# Altium PCB PCB1.PcbDoc (part 1 of 3)
Units mm, origin at the board's own origin, x right, y up, seen from the top; angles counter-clockwise.
Board outline 44.56 x 41.5 mm, 2 copper layers (Top Layer, Bottom Layer), stack 0.235 mm thick; 45 components, 47 nets, 215 pads, 58 vias.
Unrouted connection lines stored in the file: 2.
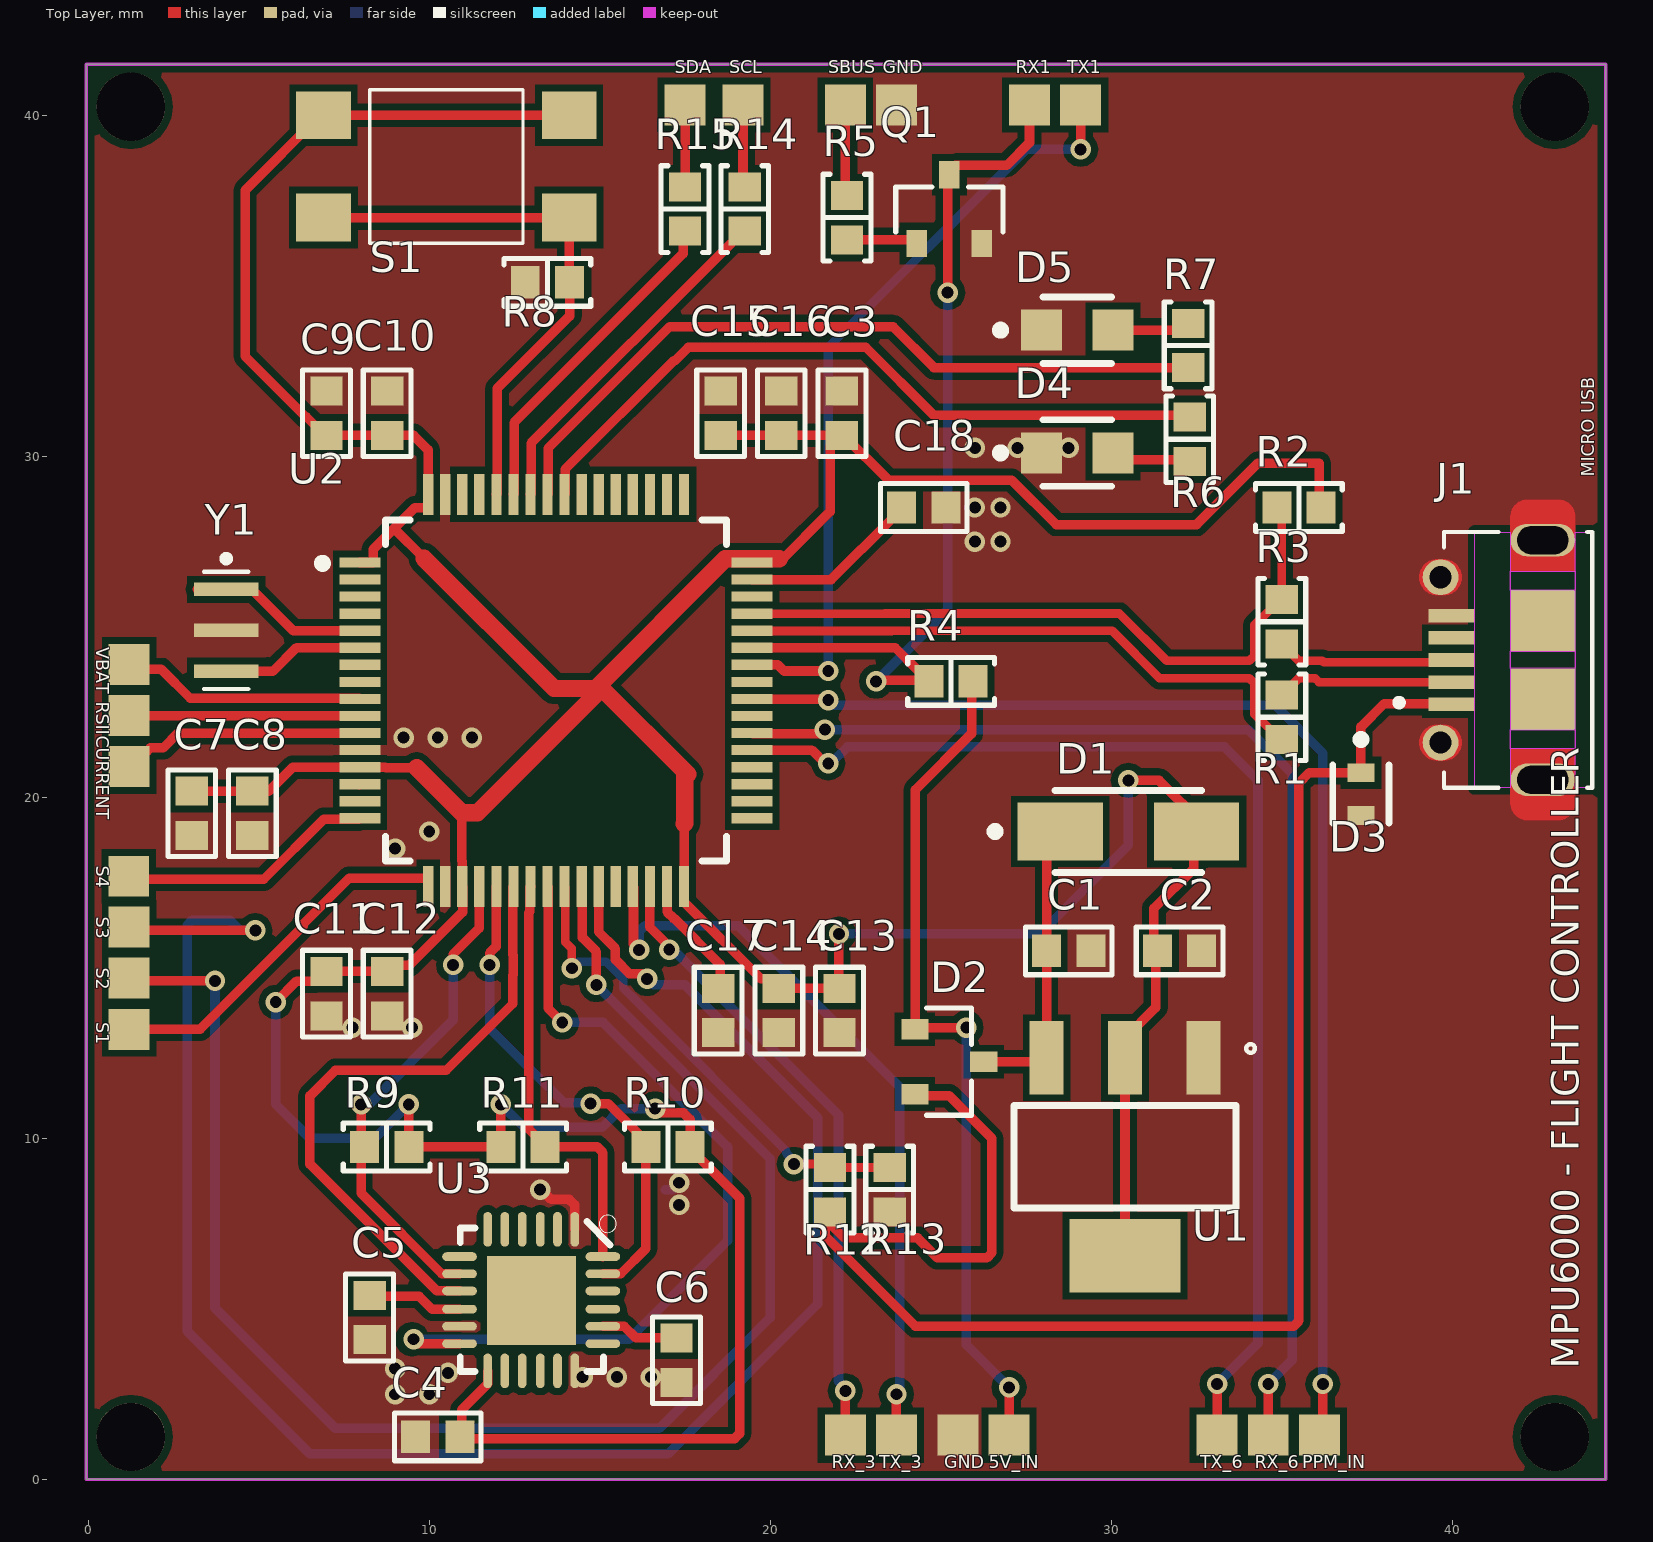
[diagram p0: Top Layer view]
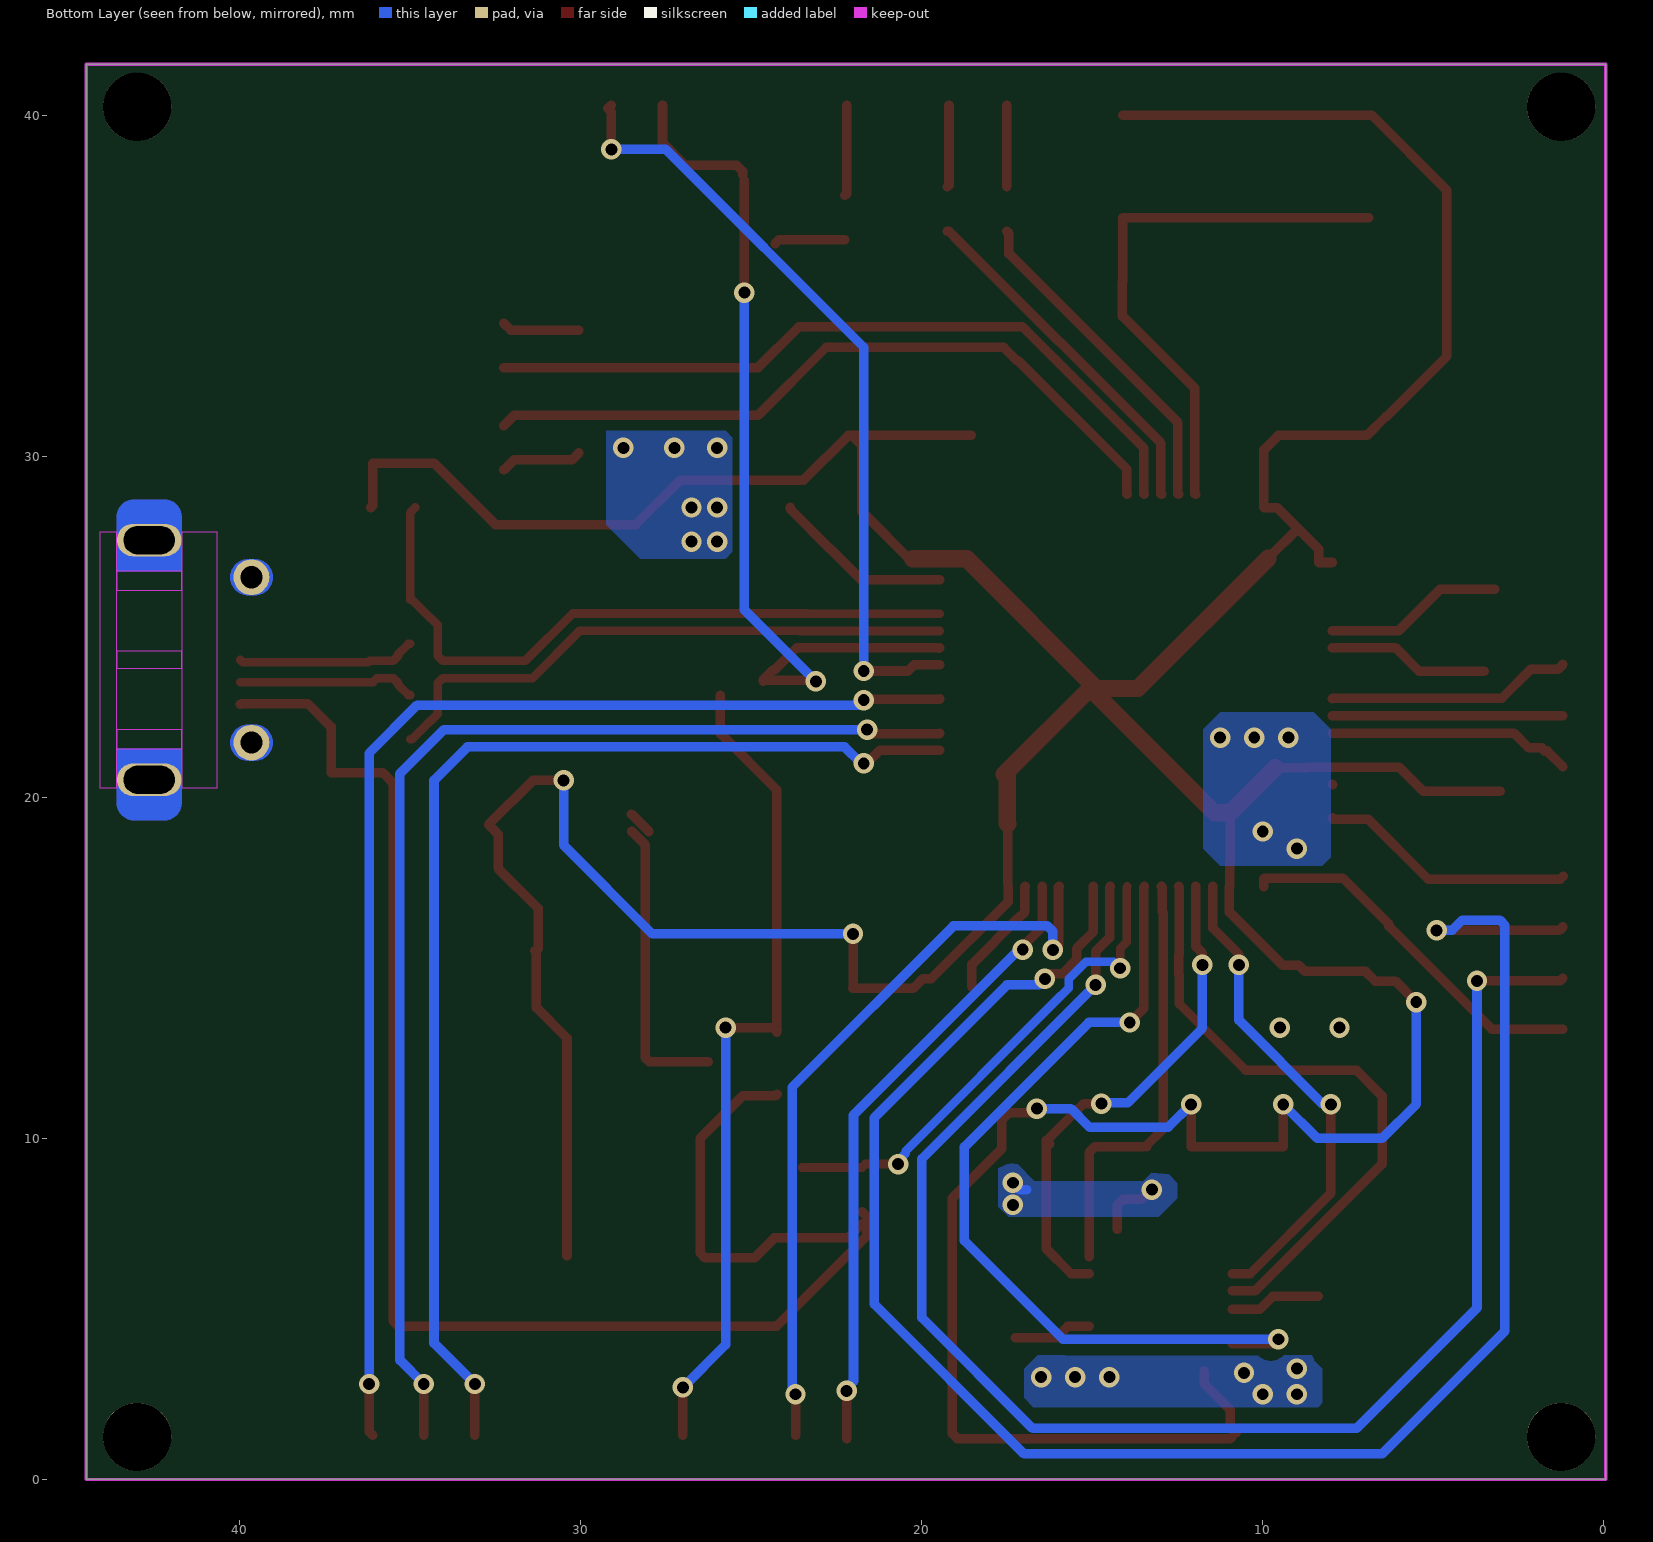
[diagram p1: Bottom Layer view, seen from below]
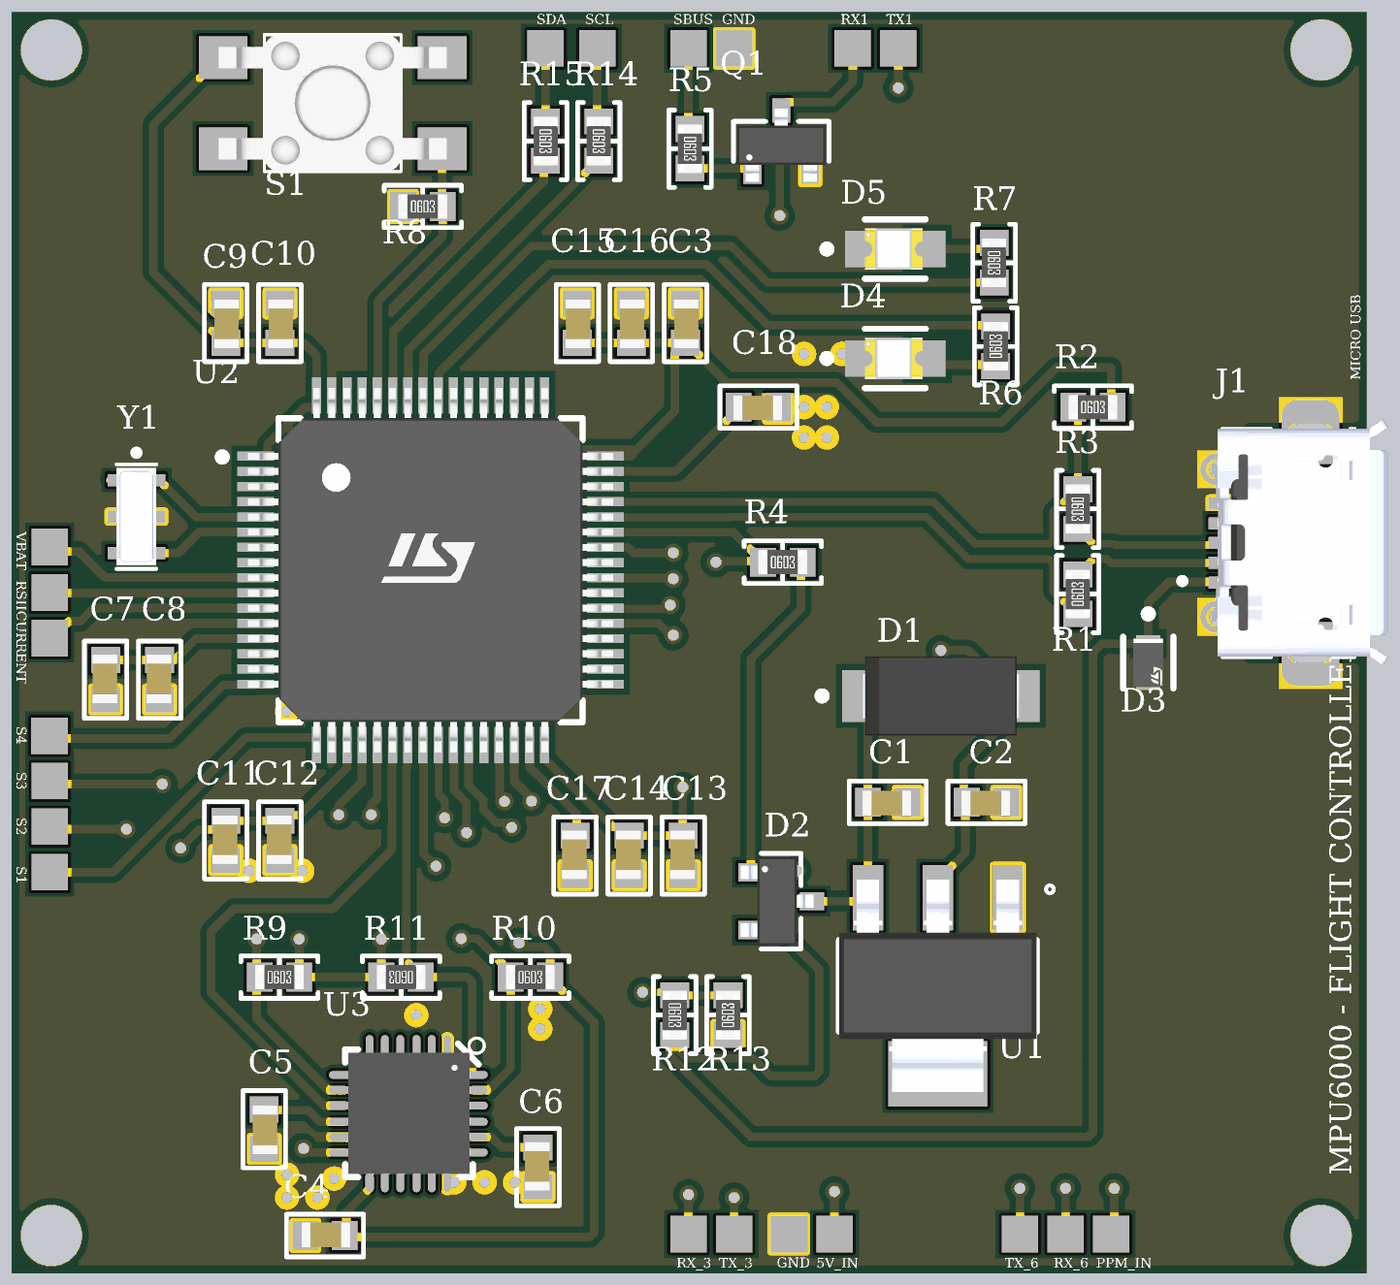
[diagram p3: 3D render of the assembled board from above, using the file's embedded part models]

## Layer stack, top to bottom
Top Solder: solder mask 0.0254, SM-001, Dk 4
Top Layer: signal copper 0.035
Dielectric 1: core 0.1651, Core-043, Dk 4.3
Bottom Layer: signal copper 0.035
Bottom Solder: solder mask 0.0254, SM-001, Dk 4

## Board outline
-0.06,0 -0.06,41.5 44.5,41.5 44.5,0

## Design rules (kind name [scope] priority, off if disabled: settings)
Clearance [All] p1: gap=0.203 ignorepadtopadclearanceinfootprint=FALSE except(0.178: Arc-Arc Arc-Track Arc-SMDPad Arc-THPad Arc-Hole Track-Track Track-SMDPad Track-THPad Track-Hole SMDPad-SMDPad SMDPad-THPad SMDPad-Hole THPad-THPad THPad-Hole Via-Hole Fill-Hole Poly-Hole Region-Hole Text-Hole; 0.254: Arc-Via Track-Via SMDPad-Via THPad-Via Via-Via)
DiffPairsRouting USB_90 [InDifferentialPair('USB')] p1: maxlimit=0.254 minlimit=0.127 mostfreqgap=0.254 toplayer_minwidth=0.254 toplayer_maxwidth=0.981 toplayer_prefwidth=0.254 bottomlayer_minwidth=0.254 bottomlayer_maxwidth=0.981 bottomlayer_prefwidth=0.254 impedanceprofiledriven=TRUE impedanceprofileid={76CF626A-820F-438A-9B0B-6253913FB44B} impedanceprofilevalue=90.000000 maxuncoupledlength=12.7
DiffPairsRouting USB_MCU_90 [InDifferentialPair('USB_MCU')] p2: maxlimit=0.254 minlimit=0.127 mostfreqgap=0.254 toplayer_minwidth=0.254 toplayer_maxwidth=0.981 toplayer_prefwidth=0.254 bottomlayer_minwidth=0.254 bottomlayer_maxwidth=0.981 bottomlayer_prefwidth=0.254 impedanceprofiledriven=TRUE impedanceprofileid={76CF626A-820F-438A-9B0B-6253913FB44B} impedanceprofilevalue=90.000000 maxuncoupledlength=12.7
MinimumSolderMaskSliver [All] p1: minsoldermaskwidth=0.127
PolygonConnect [All] p1: connectstyle=Direct reliefconductorwidth=0.254 reliefentries=4 polygonreliefangle="90 Angle" airgapwidth=0.254
RoutingVias [All] p1: holewidth=0.3 width=0.5 viastyle="Through Hole" minholewidth=0.25 minwidth=0.4 maxholewidth=0.5 maxwidth=1
SilkToSilkClearance [All] p1: silktosilkclearance=0.127
SilkToSolderMaskClearance [IsPad] p1: minsilkscreentomaskgap=0.127 clearancetoexposedcopper=TRUE
SolderMaskExpansion [All] p1: expansion=0.102 istentingtop=FALSE
UnRoutedNet [All] p1: checkbadconnections=TRUE
Width [All] p1: maxlimit=1.778 minlimit=0.203 preferedwidth=0.279
25 further rules are at their usual default settings.

## Classes and differential pairs
component class Sheet2: C17 C18 R8 R9 R10 R11 R12 R13 R14 R15 S1 U2 Y1
component class Sheet1: C1 C2 C3 C4 C5 C6 C7 C8 C9 C10 C11 C12 C13 C14 C15 C16 D1 D2 D3 D4 D5 J1 Q1 R1 R2 R3 R4 R5 R6 R7 U1 U3
differential pair USB: +USB_P -USB_N
differential pair USB_MCU: +D+ -D-

## Components (designator, comment, footprint, x,y, rotation, side; value= is the part's Value field where it differs from the comment)
C1 "10uF" CAP-0603 28.75,15.5 r180 top
C2 "10uF" CAP-0603 32,15.5 r180 top
C3 "100nF" CAP-0603 22.101,31.265 r270 top
C4 "100nF" CAP-0603 10.25,1.25 r0 top
C5 "100nF" CAP-0603 8.25,4.75 r270 top
C6 "2.2nF" CAP-0603 17.25,3.5 r90 top
C7 "1uF" CAP-0603 3.035,19.535 r90 top
C8 "100nF" CAP-0603 4.813,19.535 r90 top
C9 "10uF" CAP-0603 6.988,31.265 r270 top
C10 "100nF" CAP-0603 8.766,31.265 r270 top
C11 "10uF" CAP-0603 6.988,14.247 r90 top
C12 "100nF" CAP-0603 8.766,14.247 r90 top
C13 "10uF" CAP-0603 22.028,13.75 r90 top
C14 "100nF" CAP-0603 20.25,13.75 r90 top
C15 "10uF" CAP-0603 18.545,31.265 r270 top
C16 "100nF" CAP-0603 20.323,31.265 r270 top
C17 "100nF" CAP-0603 18.472,13.75 r90 top
C18 "100nF" CAP-0603 24.5,28.5 r180 top
D1 "S1A-13-F_1" S1A-13-F 30.5,19 r0 top
D2 "BAT54C" SOT23-3 25.25,12.25 r270 top
D3 "ESDA7P60-1U1M" TVS-1610 37.318,20.097 r270 top
D4 "LS R976-NR-1" "LS R976-NR-1" 29,30.1 r0 top
D5 "LS R976-NR-1" "LS R976-NR-1" 29,33.7 r0 top
J1 "ZX62D-B-5P8" HRS_ZX62D-B-5P8 42.577,24.03 r90 top
Q1 "BC857BLT3G" SOT23-3 25.25,37.25 r0 top
R1 "22Ohms" RES-0603 35,22.35 r90 top
R2 "1.5KOhms" RES-0603 35.5,28.5 r0 top
R3 "22Ohms" RES-0603 35,25.15 r270 top
R4 "10K" RES-0603 25.3,23.4 r0 top
R5 "4.7kOhms" RES-0603 22.25,37 r270 top
R6 "47Ohms" RES-0603 32.3,30.5 r90 top
R7 "47Ohms" RES-0603 32.25,33.25 r270 top
R8 "10K" RES-0603 13.465,35.099 r0 top
R9 "10K" RES-0603 8.75,9.75 r0 top
R10 "10K" RES-0603 17,9.75 r0 top
R11 "10K" RES-0603 12.75,9.75 r180 top
R12 "10K" RES-0603 21.75,8.5 r270 top
R13 "10K" RES-0603 23.5,8.5 r90 top
R14 "10K" RES-0603 19.25,37.25 r270 top
R15 "10K" RES-0603 17.5,37.25 r270 top
S1 "TL3305BF260QG" TL3305BF260QG 10.5,38.5 r0 top
U1 "NCP1117ST33T3G" SOT-223-4 30.4,9.464 r270 top
U2 "STM32F405RGT6" STMicroelectronics_LQFP64-5W_MFG 13.719,23.137 r0 top
U3 "MPU-6000" QFN-24-EP 13.01,5.27 r270 top
Y1 "CSTCE8M00G52-R0" OSC_CSTCE8M00G52-R0 4.048,24.9 r270 top

## Footprints (in the part's own frame and the unit in brackets; to place one, negate y for a bottom-side part, rotate by r counter-clockwise, add the part's x,y. Pads: shape width x height; smd on the part's side, far side on the other; paste and mask are expansions set on the pad)
CAP-0603 [mm]
  rect 0.85x0.95 smd: 1(-0.65,0) 2(0.65,0)
  silkscreen extent -1.27,-0.7 1.27,0.7, body extent -0.78,-0.39 0.82,0.44, height 0.82
HRS_ZX62D-B-5P8 [mm]
  rect 0.4x1.35 smd: 1(-1.3,2.6) 2(-0.65,2.6) 3(0,2.6) 4(0.65,2.6) 5(1.3,2.6)
  round 1.05 hole 0.65: S1(-2.425,2.925) S2(2.425,2.925)
  oval 0.95x1.9 hole 0.825 slot 1.5 at 90 deg: S3(-3.512,-0.075) S6(3.512,-0.075)
  rect 1.8x1.9 smd: S4(-1.15,-0.075) S5(1.15,-0.075)
  Top Layer region: 4.226,0.874 4.252,0.872 4.278,0.869 4.304,0.864 4.329,0.858 4.355,0.851 4.379,0.842 4.403,0.832 4.427,0.821 4.45,0.808 4.472,0.794 4.494,0.78 4.515,0.764 4.535,0.747 4.554,0.729 4.572,0.71 4.589,0.69 4.605,0.669 4.619,0.647 4.633,0.625 4.646,0.602 4.657,0.578 4.667,0.554 4.676,0.53 4.683,0.504 4.689,0.479 4.694,0.453 4.697,0.427 4.699,0.401 4.7,0.375 4.7,-0.075 3.925,-0.075 3.925,0.4 3.925,0.414 3.923,0.429 3.922,0.443 3.919,0.457 3.916,0.471 3.912,0.485 3.907,0.499 3.901,0.512 3.895,0.525 3.888,0.537 3.881,0.55 3.872,0.562 3.864,0.573 3.854,0.584 3.844,0.594 3.834,0.604 3.823,0.614 3.812,0.622 3.8,0.631 3.788,0.638 3.775,0.645 3.762,0.651 3.749,0.657 3.735,0.662 3.721,0.666 3.707,0.669 3.693,0.672 3.679,0.673 3.664,0.675 3.65,0.675 3.4,0.675 3.384,0.675 3.369,0.673 3.353,0.671 3.338,0.668 3.322,0.665 3.307,0.66 3.292,0.655 3.278,0.649 3.264,0.642 3.25,0.635 3.237,0.627 3.224,0.618 3.211,0.608 3.199,0.598 3.188,0.587 3.177,0.576 3.167,0.564 3.157,0.551 3.148,0.538 3.14,0.525 3.133,0.511 3.126,0.497 3.12,0.483 3.115,0.468 3.11,0.453 3.107,0.437 3.104,0.422 3.102,0.406 3.1,0.391 3.1,0.375 3.1,-0.075 2.6,-0.075 2.6,0.875 4.2,0.875
  Top Layer region: -2.6,-1.025 -4.2,-1.025 -4.226,-1.024 -4.252,-1.022 -4.278,-1.019 -4.304,-1.014 -4.329,-1.008 -4.355,-1.001 -4.379,-0.992 -4.403,-0.982 -4.427,-0.971 -4.45,-0.958 -4.472,-0.944 -4.494,-0.93 -4.515,-0.914 -4.535,-0.897 -4.554,-0.879 -4.572,-0.86 -4.589,-0.84 -4.605,-0.819 -4.619,-0.797 -4.633,-0.775 -4.646,-0.752 -4.657,-0.728 -4.667,-0.704 -4.676,-0.68 -4.683,-0.654 -4.689,-0.629 -4.694,-0.603 -4.697,-0.577 -4.699,-0.551 -4.7,-0.525 -4.7,-0.075 -3.925,-0.075 -3.925,-0.55 -3.925,-0.564 -3.923,-0.579 -3.922,-0.593 -3.919,-0.607 -3.916,-0.621 -3.912,-0.635 -3.907,-0.649 -3.901,-0.662 -3.895,-0.675 -3.888,-0.687 -3.881,-0.7 -3.872,-0.712 -3.864,-0.723 -3.854,-0.734 -3.844,-0.744 -3.834,-0.754 -3.823,-0.764 -3.812,-0.772 -3.8,-0.781 -3.788,-0.788 -3.775,-0.795 -3.762,-0.801 -3.749,-0.807 -3.735,-0.812 -3.721,-0.816 -3.707,-0.819 -3.693,-0.822 -3.679,-0.823 -3.664,-0.825 -3.65,-0.825 -3.4,-0.825 -3.384,-0.825 -3.369,-0.823 -3.353,-0.821 -3.338,-0.818 -3.322,-0.815 -3.307,-0.81 -3.292,-0.805 -3.278,-0.799 -3.264,-0.792 -3.25,-0.785 -3.237,-0.777 -3.224,-0.768 -3.211,-0.758 -3.199,-0.748 -3.188,-0.737 -3.177,-0.726 -3.167,-0.714 -3.157,-0.701 -3.148,-0.688 -3.14,-0.675 -3.133,-0.661 -3.126,-0.647 -3.12,-0.633 -3.115,-0.618 -3.11,-0.603 -3.107,-0.587 -3.104,-0.572 -3.102,-0.556 -3.1,-0.541 -3.1,-0.525 -3.1,-0.075 -2.6,-0.075
  Top Layer region: 4.7,-0.525 4.699,-0.551 4.697,-0.577 4.694,-0.603 4.689,-0.629 4.683,-0.654 4.676,-0.68 4.667,-0.704 4.657,-0.728 4.646,-0.752 4.633,-0.775 4.619,-0.797 4.605,-0.819 4.589,-0.84 4.572,-0.86 4.554,-0.879 4.535,-0.897 4.515,-0.914 4.494,-0.93 4.472,-0.944 4.45,-0.958 4.427,-0.971 4.403,-0.982 4.379,-0.992 4.355,-1.001 4.329,-1.008 4.304,-1.014 4.278,-1.019 4.252,-1.022 4.226,-1.024 4.2,-1.025 2.6,-1.025 2.6,-0.075 3.1,-0.075 3.1,-0.525 3.1,-0.541 3.102,-0.556 3.104,-0.572 3.107,-0.587 3.11,-0.603 3.115,-0.618 3.12,-0.633 3.126,-0.647 3.133,-0.661 3.14,-0.675 3.148,-0.688 3.157,-0.701 3.167,-0.714 3.177,-0.726 3.188,-0.737 3.199,-0.748 3.211,-0.758 3.224,-0.768 3.237,-0.777 3.25,-0.785 3.264,-0.792 3.278,-0.799 3.292,-0.805 3.307,-0.81 3.322,-0.815 3.338,-0.818 3.353,-0.821 3.369,-0.823 3.384,-0.825 3.4,-0.825 3.625,-0.825 3.641,-0.825 3.656,-0.823 3.672,-0.821 3.687,-0.818 3.703,-0.815 3.718,-0.81 3.733,-0.805 3.747,-0.799 3.761,-0.792 3.775,-0.785 3.788,-0.777 3.801,-0.768 3.814,-0.758 3.826,-0.748 3.837,-0.737 3.848,-0.726 3.858,-0.714 3.868,-0.701 3.877,-0.688 3.885,-0.675 3.892,-0.661 3.899,-0.647 3.905,-0.633 3.91,-0.618 3.915,-0.603 3.918,-0.587 3.921,-0.572 3.923,-0.556 3.925,-0.541 3.925,-0.525 3.925,-0.075 4.7,-0.075
  Top Layer region: -2.6,-0.075 -3.1,-0.075 -3.1,0.375 -3.1,0.391 -3.102,0.406 -3.104,0.422 -3.107,0.437 -3.11,0.453 -3.115,0.468 -3.12,0.483 -3.126,0.497 -3.133,0.511 -3.14,0.525 -3.148,0.538 -3.157,0.551 -3.167,0.564 -3.177,0.576 -3.188,0.587 -3.199,0.598 -3.211,0.608 -3.224,0.618 -3.237,0.627 -3.25,0.635 -3.264,0.642 -3.278,0.649 -3.292,0.655 -3.307,0.66 -3.322,0.665 -3.338,0.668 -3.353,0.671 -3.369,0.673 -3.384,0.675 -3.4,0.675 -3.625,0.675 -3.641,0.675 -3.656,0.673 -3.672,0.671 -3.687,0.668 -3.703,0.665 -3.718,0.66 -3.733,0.655 -3.747,0.649 -3.761,0.642 -3.775,0.635 -3.788,0.627 -3.801,0.618 -3.814,0.608 -3.826,0.598 -3.837,0.587 -3.848,0.576 -3.858,0.564 -3.868,0.551 -3.877,0.538 -3.885,0.525 -3.892,0.511 -3.899,0.497 -3.905,0.483 -3.91,0.468 -3.915,0.453 -3.918,0.437 -3.921,0.422 -3.923,0.406 -3.925,0.391 -3.925,0.375 -3.925,-0.075 -4.7,-0.075 -4.7,0.375 -4.699,0.401 -4.697,0.427 -4.694,0.453 -4.689,0.479 -4.683,0.504 -4.676,0.53 -4.667,0.554 -4.657,0.578 -4.646,0.602 -4.633,0.625 -4.619,0.647 -4.605,0.669 -4.589,0.69 -4.572,0.71 -4.554,0.729 -4.535,0.747 -4.515,0.764 -4.494,0.78 -4.472,0.794 -4.45,0.808 -4.427,0.821 -4.403,0.832 -4.379,0.842 -4.355,0.851 -4.329,0.858 -4.304,0.864 -4.278,0.869 -4.252,0.872 -4.226,0.874 -4.2,0.875 -2.6,0.875
  Top Layer region: 2.425,3.35 2.408,3.35 2.391,3.348 2.374,3.346 2.357,3.343 2.341,3.339 2.325,3.334 2.309,3.328 2.293,3.322 2.277,3.315 2.262,3.306 2.248,3.298 2.234,3.288 2.22,3.278 2.208,3.267 2.195,3.255 2.183,3.242 2.172,3.23 2.162,3.216 2.152,3.202 2.144,3.187 2.135,3.173 2.128,3.157 2.122,3.141 2.116,3.125 2.111,3.109 2.107,3.093 2.104,3.076 2.102,3.059 2.1,3.042 2.1,3.025 2.1,2.825 2.1,2.808 2.102,2.791 2.104,2.774 2.107,2.757 2.111,2.741 2.116,2.725 2.122,2.709 2.128,2.693 2.135,2.677 2.144,2.662 2.152,2.648 2.162,2.634 2.172,2.62 2.183,2.608 2.195,2.595 2.208,2.583 2.22,2.572 2.234,2.562 2.248,2.552 2.262,2.544 2.277,2.535 2.293,2.528 2.309,2.522 2.325,2.516 2.341,2.511 2.357,2.507 2.374,2.504 2.391,2.502 2.408,2.5 2.425,2.5 2.425,2.3 2.398,2.301 2.37,2.303 2.343,2.306 2.316,2.311 2.289,2.318 2.263,2.326 2.237,2.335 2.211,2.345 2.187,2.357 2.163,2.37 2.139,2.385 2.116,2.4 2.095,2.417 2.074,2.435 2.054,2.454 2.035,2.474 2.017,2.495 2,2.516 1.985,2.539 1.97,2.562 1.957,2.587 1.945,2.611 1.935,2.637 1.926,2.663 1.918,2.689 1.911,2.716 1.906,2.743 1.903,2.77 1.901,2.798 1.9,2.825 1.9,3.025 1.901,3.052 1.903,3.08 1.906,3.107 1.911,3.134 1.918,3.161 1.926,3.187 1.935,3.213 1.945,3.239 1.957,3.263 1.97,3.287 1.985,3.311 2,3.334 2.017,3.355 2.035,3.376 2.054,3.396 2.074,3.415 2.095,3.433 2.116,3.45 2.139,3.465 2.163,3.48 2.187,3.493 2.211,3.505 2.237,3.515 2.263,3.524 2.289,3.532 2.316,3.539 2.343,3.544 2.37,3.547 2.398,3.549 2.425,3.55
  Top Layer region: 2.452,3.549 2.48,3.547 2.507,3.544 2.534,3.539 2.561,3.532 2.587,3.524 2.613,3.515 2.639,3.505 2.663,3.493 2.688,3.48 2.711,3.465 2.734,3.45 2.755,3.433 2.776,3.415 2.796,3.396 2.815,3.376 2.833,3.355 2.85,3.334 2.865,3.311 2.88,3.287 2.893,3.263 2.905,3.239 2.915,3.213 2.924,3.187 2.932,3.161 2.939,3.134 2.944,3.107 2.947,3.08 2.949,3.052 2.95,3.025 2.95,2.825 2.949,2.798 2.947,2.77 2.944,2.743 2.939,2.716 2.932,2.689 2.924,2.663 2.915,2.637 2.905,2.611 2.893,2.587 2.88,2.562 2.865,2.539 2.85,2.516 2.833,2.495 2.815,2.474 2.796,2.454 2.776,2.435 2.755,2.417 2.734,2.4 2.711,2.385 2.688,2.37 2.663,2.357 2.639,2.345 2.613,2.335 2.587,2.326 2.561,2.318 2.534,2.311 2.507,2.306 2.48,2.303 2.452,2.301 2.425,2.3 2.425,2.5 2.442,2.5 2.459,2.502 2.476,2.504 2.493,2.507 2.509,2.511 2.525,2.516 2.541,2.522 2.557,2.528 2.573,2.535 2.588,2.544 2.602,2.552 2.616,2.562 2.63,2.572 2.642,2.583 2.655,2.595 2.667,2.608 2.678,2.62 2.688,2.634 2.698,2.648 2.706,2.662 2.715,2.677 2.722,2.693 2.728,2.709 2.734,2.725 2.739,2.741 2.743,2.757 2.746,2.774 2.748,2.791 2.75,2.808 2.75,2.825 2.75,3.025 2.75,3.042 2.748,3.059 2.746,3.076 2.743,3.093 2.739,3.109 2.734,3.125 2.728,3.141 2.722,3.157 2.715,3.173 2.706,3.187 2.698,3.202 2.688,3.216 2.678,3.23 2.667,3.242 2.655,3.255 2.642,3.267 2.63,3.278 2.616,3.288 2.602,3.298 2.588,3.306 2.573,3.315 2.557,3.322 2.541,3.328 2.525,3.334 2.509,3.339 2.493,3.343 2.476,3.346 2.459,3.348 2.442,3.35 2.425,3.35 2.425,3.55
  Top Layer region: -2.425,3.35 -2.442,3.35 -2.459,3.348 -2.476,3.346 -2.493,3.343 -2.509,3.339 -2.525,3.334 -2.541,3.328 -2.557,3.322 -2.573,3.315 -2.588,3.306 -2.602,3.298 -2.616,3.288 -2.63,3.278 -2.642,3.267 -2.655,3.255 -2.667,3.242 -2.678,3.23 -2.688,3.216 -2.698,3.202 -2.706,3.187 -2.715,3.173 -2.722,3.157 -2.728,3.141 -2.734,3.125 -2.739,3.109 -2.743,3.093 -2.746,3.076 -2.748,3.059 -2.75,3.042 -2.75,3.025 -2.75,2.825 -2.75,2.808 -2.748,2.791 -2.746,2.774 -2.743,2.757 -2.739,2.741 -2.734,2.725 -2.728,2.709 -2.722,2.693 -2.715,2.677 -2.706,2.662 -2.698,2.648 -2.688,2.634 -2.678,2.62 -2.667,2.608 -2.655,2.595 -2.642,2.583 -2.63,2.572 -2.616,2.562 -2.602,2.552 -2.588,2.544 -2.573,2.535 -2.557,2.528 -2.541,2.522 -2.525,2.516 -2.509,2.511 -2.493,2.507 -2.476,2.504 -2.459,2.502 -2.442,2.5 -2.425,2.5 -2.425,2.3 -2.452,2.301 -2.48,2.303 -2.507,2.306 -2.534,2.311 -2.561,2.318 -2.587,2.326 -2.613,2.335 -2.639,2.345 -2.663,2.357 -2.688,2.37 -2.711,2.385 -2.734,2.4 -2.755,2.417 -2.776,2.435 -2.796,2.454 -2.815,2.474 -2.833,2.495 -2.85,2.516 -2.865,2.539 -2.88,2.562 -2.893,2.587 -2.905,2.611 -2.915,2.637 -2.924,2.663 -2.932,2.689 -2.939,2.716 -2.944,2.743 -2.947,2.77 -2.949,2.798 -2.95,2.825 -2.95,3.025 -2.949,3.052 -2.947,3.08 -2.944,3.107 -2.939,3.134 -2.932,3.161 -2.924,3.187 -2.915,3.213 -2.905,3.239 -2.893,3.263 -2.88,3.287 -2.865,3.311 -2.85,3.334 -2.833,3.355 -2.815,3.376 -2.796,3.396 -2.776,3.415 -2.755,3.433 -2.734,3.45 -2.711,3.465 -2.688,3.48 -2.663,3.493 -2.639,3.505 -2.613,3.515 -2.587,3.524 -2.561,3.532 -2.534,3.539 -2.507,3.544 -2.48,3.547 -2.452,3.549 -2.425,3.55
  Top Layer region: -2.398,3.549 -2.37,3.547 -2.343,3.544 -2.316,3.539 -2.289,3.532 -2.263,3.524 -2.237,3.515 -2.211,3.505 -2.187,3.493 -2.163,3.48 -2.139,3.465 -2.116,3.45 -2.095,3.433 -2.074,3.415 -2.054,3.396 -2.035,3.376 -2.017,3.355 -2,3.334 -1.985,3.311 -1.97,3.287 -1.957,3.263 -1.945,3.239 -1.935,3.213 -1.926,3.187 -1.918,3.161 -1.911,3.134 -1.906,3.107 -1.903,3.08 -1.901,3.052 -1.9,3.025 -1.9,2.825 -1.901,2.798 -1.903,2.77 -1.906,2.743 -1.911,2.716 -1.918,2.689 -1.926,2.663 -1.935,2.637 -1.945,2.611 -1.957,2.587 -1.97,2.562 -1.985,2.539 -2,2.516 -2.017,2.495 -2.035,2.474 -2.054,2.454 -2.074,2.435 -2.095,2.417 -2.116,2.4 -2.139,2.385 -2.163,2.37 -2.187,2.357 -2.211,2.345 -2.237,2.335 -2.263,2.326 -2.289,2.318 -2.316,2.311 -2.343,2.306 -2.37,2.303 -2.398,2.301 -2.425,2.3 -2.425,2.5 -2.408,2.5 -2.391,2.502 -2.374,2.504 -2.357,2.507 -2.341,2.511 -2.325,2.516 -2.309,2.522 -2.293,2.528 -2.277,2.535 -2.262,2.544 -2.248,2.552 -2.234,2.562 -2.22,2.572 -2.208,2.583 -2.195,2.595 -2.183,2.608 -2.172,2.62 -2.162,2.634 -2.152,2.648 -2.144,2.662 -2.135,2.677 -2.128,2.693 -2.122,2.709 -2.116,2.725 -2.111,2.741 -2.107,2.757 -2.104,2.774 -2.102,2.791 -2.1,2.808 -2.1,2.825 -2.1,3.025 -2.1,3.042 -2.102,3.059 -2.104,3.076 -2.107,3.093 -2.111,3.109 -2.116,3.125 -2.122,3.141 -2.128,3.157 -2.135,3.173 -2.144,3.187 -2.152,3.202 -2.162,3.216 -2.172,3.23 -2.183,3.242 -2.195,3.255 -2.208,3.267 -2.22,3.278 -2.234,3.288 -2.248,3.298 -2.262,3.306 -2.277,3.315 -2.293,3.322 -2.309,3.328 -2.325,3.334 -2.341,3.339 -2.357,3.343 -2.374,3.346 -2.391,3.348 -2.408,3.35 -2.425,3.35 -2.425,3.55
  Bottom Layer region: 4.226,0.874 4.252,0.872 4.278,0.869 4.304,0.864 4.329,0.858 4.355,0.851 4.379,0.842 4.403,0.832 4.427,0.821 4.45,0.808 4.472,0.794 4.494,0.78 4.515,0.764 4.535,0.747 4.554,0.729 4.572,0.71 4.589,0.69 4.605,0.669 4.619,0.647 4.633,0.625 4.646,0.602 4.657,0.578 4.667,0.554 4.676,0.53 4.683,0.504 4.689,0.479 4.694,0.453 4.697,0.427 4.699,0.401 4.7,0.375 4.7,-0.075 3.925,-0.075 3.925,0.4 3.925,0.414 3.923,0.429 3.922,0.443 3.919,0.457 3.916,0.471 3.912,0.485 3.907,0.499 3.901,0.512 3.895,0.525 3.888,0.537 3.881,0.55 3.872,0.562 3.864,0.573 3.854,0.584 3.844,0.594 3.834,0.604 3.823,0.614 3.812,0.622 3.8,0.631 3.788,0.638 3.775,0.645 3.762,0.651 3.749,0.657 3.735,0.662 3.721,0.666 3.707,0.669 3.693,0.672 3.679,0.673 3.664,0.675 3.65,0.675 3.4,0.675 3.384,0.675 3.369,0.673 3.353,0.671 3.338,0.668 3.322,0.665 3.307,0.66 3.292,0.655 3.278,0.649 3.264,0.642 3.25,0.635 3.237,0.627 3.224,0.618 3.211,0.608 3.199,0.598 3.188,0.587 3.177,0.576 3.167,0.564 3.157,0.551 3.148,0.538 3.14,0.525 3.133,0.511 3.126,0.497 3.12,0.483 3.115,0.468 3.11,0.453 3.107,0.437 3.104,0.422 3.102,0.406 3.1,0.391 3.1,0.375 3.1,-0.075 2.6,-0.075 2.6,0.875 4.2,0.875
  Bottom Layer region: -2.6,-1.025 -4.2,-1.025 -4.226,-1.024 -4.252,-1.022 -4.278,-1.019 -4.304,-1.014 -4.329,-1.008 -4.355,-1.001 -4.379,-0.992 -4.403,-0.982 -4.427,-0.971 -4.45,-0.958 -4.472,-0.944 -4.494,-0.93 -4.515,-0.914 -4.535,-0.897 -4.554,-0.879 -4.572,-0.86 -4.589,-0.84 -4.605,-0.819 -4.619,-0.797 -4.633,-0.775 -4.646,-0.752 -4.657,-0.728 -4.667,-0.704 -4.676,-0.68 -4.683,-0.654 -4.689,-0.629 -4.694,-0.603 -4.697,-0.577 -4.699,-0.551 -4.7,-0.525 -4.7,-0.075 -3.925,-0.075 -3.925,-0.55 -3.925,-0.564 -3.923,-0.579 -3.922,-0.593 -3.919,-0.607 -3.916,-0.621 -3.912,-0.635 -3.907,-0.649 -3.901,-0.662 -3.895,-0.675 -3.888,-0.687 -3.881,-0.7 -3.872,-0.712 -3.864,-0.723 -3.854,-0.734 -3.844,-0.744 -3.834,-0.754 -3.823,-0.764 -3.812,-0.772 -3.8,-0.781 -3.788,-0.788 -3.775,-0.795 -3.762,-0.801 -3.749,-0.807 -3.735,-0.812 -3.721,-0.816 -3.707,-0.819 -3.693,-0.822 -3.679,-0.823 -3.664,-0.825 -3.65,-0.825 -3.4,-0.825 -3.384,-0.825 -3.369,-0.823 -3.353,-0.821 -3.338,-0.818 -3.322,-0.815 -3.307,-0.81 -3.292,-0.805 -3.278,-0.799 -3.264,-0.792 -3.25,-0.785 -3.237,-0.777 -3.224,-0.768 -3.211,-0.758 -3.199,-0.748 -3.188,-0.737 -3.177,-0.726 -3.167,-0.714 -3.157,-0.701 -3.148,-0.688 -3.14,-0.675 -3.133,-0.661 -3.126,-0.647 -3.12,-0.633 -3.115,-0.618 -3.11,-0.603 -3.107,-0.587 -3.104,-0.572 -3.102,-0.556 -3.1,-0.541 -3.1,-0.525 -3.1,-0.075 -2.6,-0.075
  Bottom Layer region: 4.7,-0.525 4.699,-0.551 4.697,-0.577 4.694,-0.603 4.689,-0.629 4.683,-0.654 4.676,-0.68 4.667,-0.704 4.657,-0.728 4.646,-0.752 4.633,-0.775 4.619,-0.797 4.605,-0.819 4.589,-0.84 4.572,-0.86 4.554,-0.879 4.535,-0.897 4.515,-0.914 4.494,-0.93 4.472,-0.944 4.45,-0.958 4.427,-0.971 4.403,-0.982 4.379,-0.992 4.355,-1.001 4.329,-1.008 4.304,-1.014 4.278,-1.019 4.252,-1.022 4.226,-1.024 4.2,-1.025 2.6,-1.025 2.6,-0.075 3.1,-0.075 3.1,-0.525 3.1,-0.541 3.102,-0.556 3.104,-0.572 3.107,-0.587 3.11,-0.603 3.115,-0.618 3.12,-0.633 3.126,-0.647 3.133,-0.661 3.14,-0.675 3.148,-0.688 3.157,-0.701 3.167,-0.714 3.177,-0.726 3.188,-0.737 3.199,-0.748 3.211,-0.758 3.224,-0.768 3.237,-0.777 3.25,-0.785 3.264,-0.792 3.278,-0.799 3.292,-0.805 3.307,-0.81 3.322,-0.815 3.338,-0.818 3.353,-0.821 3.369,-0.823 3.384,-0.825 3.4,-0.825 3.625,-0.825 3.641,-0.825 3.656,-0.823 3.672,-0.821 3.687,-0.818 3.703,-0.815 3.718,-0.81 3.733,-0.805 3.747,-0.799 3.761,-0.792 3.775,-0.785 3.788,-0.777 3.801,-0.768 3.814,-0.758 3.826,-0.748 3.837,-0.737 3.848,-0.726 3.858,-0.714 3.868,-0.701 3.877,-0.688 3.885,-0.675 3.892,-0.661 3.899,-0.647 3.905,-0.633 3.91,-0.618 3.915,-0.603 3.918,-0.587 3.921,-0.572 3.923,-0.556 3.925,-0.541 3.925,-0.525 3.925,-0.075 4.7,-0.075
  Bottom Layer region: -2.6,-0.075 -3.1,-0.075 -3.1,0.375 -3.1,0.391 -3.102,0.406 -3.104,0.422 -3.107,0.437 -3.11,0.453 -3.115,0.468 -3.12,0.483 -3.126,0.497 -3.133,0.511 -3.14,0.525 -3.148,0.538 -3.157,0.551 -3.167,0.564 -3.177,0.576 -3.188,0.587 -3.199,0.598 -3.211,0.608 -3.224,0.618 -3.237,0.627 -3.25,0.635 -3.264,0.642 -3.278,0.649 -3.292,0.655 -3.307,0.66 -3.322,0.665 -3.338,0.668 -3.353,0.671 -3.369,0.673 -3.384,0.675 -3.4,0.675 -3.625,0.675 -3.641,0.675 -3.656,0.673 -3.672,0.671 -3.687,0.668 -3.703,0.665 -3.718,0.66 -3.733,0.655 -3.747,0.649 -3.761,0.642 -3.775,0.635 -3.788,0.627 -3.801,0.618 -3.814,0.608 -3.826,0.598 -3.837,0.587 -3.848,0.576 -3.858,0.564 -3.868,0.551 -3.877,0.538 -3.885,0.525 -3.892,0.511 -3.899,0.497 -3.905,0.483 -3.91,0.468 -3.915,0.453 -3.918,0.437 -3.921,0.422 -3.923,0.406 -3.925,0.391 -3.925,0.375 -3.925,-0.075 -4.7,-0.075 -4.7,0.375 -4.699,0.401 -4.697,0.427 -4.694,0.453 -4.689,0.479 -4.683,0.504 -4.676,0.53 -4.667,0.554 -4.657,0.578 -4.646,0.602 -4.633,0.625 -4.619,0.647 -4.605,0.669 -4.589,0.69 -4.572,0.71 -4.554,0.729 -4.535,0.747 -4.515,0.764 -4.494,0.78 -4.472,0.794 -4.45,0.808 -4.427,0.821 -4.403,0.832 -4.379,0.842 -4.355,0.851 -4.329,0.858 -4.304,0.864 -4.278,0.869 -4.252,0.872 -4.226,0.874 -4.2,0.875 -2.6,0.875
  Bottom Layer region: 2.425,3.35 2.408,3.35 2.391,3.348 2.374,3.346 2.357,3.343 2.341,3.339 2.325,3.334 2.309,3.328 2.293,3.322 2.277,3.315 2.262,3.306 2.248,3.298 2.234,3.288 2.22,3.278 2.208,3.267 2.195,3.255 2.183,3.242 2.172,3.23 2.162,3.216 2.152,3.202 2.144,3.187 2.135,3.173 2.128,3.157 2.122,3.141 2.116,3.125 2.111,3.109 2.107,3.093 2.104,3.076 2.102,3.059 2.1,3.042 2.1,3.025 2.1,2.825 2.1,2.808 2.102,2.791 2.104,2.774 2.107,2.757 2.111,2.741 2.116,2.725 2.122,2.709 2.128,2.693 2.135,2.677 2.144,2.662 2.152,2.648 2.162,2.634 2.172,2.62 2.183,2.608 2.195,2.595 2.208,2.583 2.22,2.572 2.234,2.562 2.248,2.552 2.262,2.544 2.277,2.535 2.293,2.528 2.309,2.522 2.325,2.516 2.341,2.511 2.357,2.507 2.374,2.504 2.391,2.502 2.408,2.5 2.425,2.5 2.425,2.3 2.398,2.301 2.37,2.303 2.343,2.306 2.316,2.311 2.289,2.318 2.263,2.326 2.237,2.335 2.211,2.345 2.187,2.357 2.163,2.37 2.139,2.385 2.116,2.4 2.095,2.417 2.074,2.435 2.054,2.454 2.035,2.474 2.017,2.495 2,2.516 1.985,2.539 1.97,2.562 1.957,2.587 1.945,2.611 1.935,2.637 1.926,2.663 1.918,2.689 1.911,2.716 1.906,2.743 1.903,2.77 1.901,2.798 1.9,2.825 1.9,3.025 1.901,3.052 1.903,3.08 1.906,3.107 1.911,3.134 1.918,3.161 1.926,3.187 1.935,3.213 1.945,3.239 1.957,3.263 1.97,3.287 1.985,3.311 2,3.334 2.017,3.355 2.035,3.376 2.054,3.396 2.074,3.415 2.095,3.433 2.116,3.45 2.139,3.465 2.163,3.48 2.187,3.493 2.211,3.505 2.237,3.515 2.263,3.524 2.289,3.532 2.316,3.539 2.343,3.544 2.37,3.547 2.398,3.549 2.425,3.55
  Bottom Layer region: 2.452,3.549 2.48,3.547 2.507,3.544 2.534,3.539 2.561,3.532 2.587,3.524 2.613,3.515 2.639,3.505 2.663,3.493 2.688,3.48 2.711,3.465 2.734,3.45 2.755,3.433 2.776,3.415 2.796,3.396 2.815,3.376 2.833,3.355 2.85,3.334 2.865,3.311 2.88,3.287 2.893,3.263 2.905,3.239 2.915,3.213 2.924,3.187 2.932,3.161 2.939,3.134 2.944,3.107 2.947,3.08 2.949,3.052 2.95,3.025 2.95,2.825 2.949,2.798 2.947,2.77 2.944,2.743 2.939,2.716 2.932,2.689 2.924,2.663 2.915,2.637 2.905,2.611 2.893,2.587 2.88,2.562 2.865,2.539 2.85,2.516 2.833,2.495 2.815,2.474 2.796,2.454 2.776,2.435 2.755,2.417 2.734,2.4 2.711,2.385 2.688,2.37 2.663,2.357 2.639,2.345 2.613,2.335 2.587,2.326 2.561,2.318 2.534,2.311 2.507,2.306 2.48,2.303 2.452,2.301 2.425,2.3 2.425,2.5 2.442,2.5 2.459,2.502 2.476,2.504 2.493,2.507 2.509,2.511 2.525,2.516 2.541,2.522 2.557,2.528 2.573,2.535 2.588,2.544 2.602,2.552 2.616,2.562 2.63,2.572 2.642,2.583 2.655,2.595 2.667,2.608 2.678,2.62 2.688,2.634 2.698,2.648 2.706,2.662 2.715,2.677 2.722,2.693 2.728,2.709 2.734,2.725 2.739,2.741 2.743,2.757 2.746,2.774 2.748,2.791 2.75,2.808 2.75,2.825 2.75,3.025 2.75,3.042 2.748,3.059 2.746,3.076 2.743,3.093 2.739,3.109 2.734,3.125 2.728,3.141 2.722,3.157 2.715,3.173 2.706,3.187 2.698,3.202 2.688,3.216 2.678,3.23 2.667,3.242 2.655,3.255 2.642,3.267 2.63,3.278 2.616,3.288 2.602,3.298 2.588,3.306 2.573,3.315 2.557,3.322 2.541,3.328 2.525,3.334 2.509,3.339 2.493,3.343 2.476,3.346 2.459,3.348 2.442,3.35 2.425,3.35 2.425,3.55
  Bottom Layer region: -2.425,3.35 -2.442,3.35 -2.459,3.348 -2.476,3.346 -2.493,3.343 -2.509,3.339 -2.525,3.334 -2.541,3.328 -2.557,3.322 -2.573,3.315 -2.588,3.306 -2.602,3.298 -2.616,3.288 -2.63,3.278 -2.642,3.267 -2.655,3.255 -2.667,3.242 -2.678,3.23 -2.688,3.216 -2.698,3.202 -2.706,3.187 -2.715,3.173 -2.722,3.157 -2.728,3.141 -2.734,3.125 -2.739,3.109 -2.743,3.093 -2.746,3.076 -2.748,3.059 -2.75,3.042 -2.75,3.025 -2.75,2.825 -2.75,2.808 -2.748,2.791 -2.746,2.774 -2.743,2.757 -2.739,2.741 -2.734,2.725 -2.728,2.709 -2.722,2.693 -2.715,2.677 -2.706,2.662 -2.698,2.648 -2.688,2.634 -2.678,2.62 -2.667,2.608 -2.655,2.595 -2.642,2.583 -2.63,2.572 -2.616,2.562 -2.602,2.552 -2.588,2.544 -2.573,2.535 -2.557,2.528 -2.541,2.522 -2.525,2.516 -2.509,2.511 -2.493,2.507 -2.476,2.504 -2.459,2.502 -2.442,2.5 -2.425,2.5 -2.425,2.3 -2.452,2.301 -2.48,2.303 -2.507,2.306 -2.534,2.311 -2.561,2.318 -2.587,2.326 -2.613,2.335 -2.639,2.345 -2.663,2.357 -2.688,2.37 -2.711,2.385 -2.734,2.4 -2.755,2.417 -2.776,2.435 -2.796,2.454 -2.815,2.474 -2.833,2.495 -2.85,2.516 -2.865,2.539 -2.88,2.562 -2.893,2.587 -2.905,2.611 -2.915,2.637 -2.924,2.663 -2.932,2.689 -2.939,2.716 -2.944,2.743 -2.947,2.77 -2.949,2.798 -2.95,2.825 -2.95,3.025 -2.949,3.052 -2.947,3.08 -2.944,3.107 -2.939,3.134 -2.932,3.161 -2.924,3.187 -2.915,3.213 -2.905,3.239 -2.893,3.263 -2.88,3.287 -2.865,3.311 -2.85,3.334 -2.833,3.355 -2.815,3.376 -2.796,3.396 -2.776,3.415 -2.755,3.433 -2.734,3.45 -2.711,3.465 -2.688,3.48 -2.663,3.493 -2.639,3.505 -2.613,3.515 -2.587,3.524 -2.561,3.532 -2.534,3.539 -2.507,3.544 -2.48,3.547 -2.452,3.549 -2.425,3.55
  Bottom Layer region: -2.398,3.549 -2.37,3.547 -2.343,3.544 -2.316,3.539 -2.289,3.532 -2.263,3.524 -2.237,3.515 -2.211,3.505 -2.187,3.493 -2.163,3.48 -2.139,3.465 -2.116,3.45 -2.095,3.433 -2.074,3.415 -2.054,3.396 -2.035,3.376 -2.017,3.355 -2,3.334 -1.985,3.311 -1.97,3.287 -1.957,3.263 -1.945,3.239 -1.935,3.213 -1.926,3.187 -1.918,3.161 -1.911,3.134 -1.906,3.107 -1.903,3.08 -1.901,3.052 -1.9,3.025 -1.9,2.825 -1.901,2.798 -1.903,2.77 -1.906,2.743 -1.911,2.716 -1.918,2.689 -1.926,2.663 -1.935,2.637 -1.945,2.611 -1.957,2.587 -1.97,2.562 -1.985,2.539 -2,2.516 -2.017,2.495 -2.035,2.474 -2.054,2.454 -2.074,2.435 -2.095,2.417 -2.116,2.4 -2.139,2.385 -2.163,2.37 -2.187,2.357 -2.211,2.345 -2.237,2.335 -2.263,2.326 -2.289,2.318 -2.316,2.311 -2.343,2.306 -2.37,2.303 -2.398,2.301 -2.425,2.3 -2.425,2.5 -2.408,2.5 -2.391,2.502 -2.374,2.504 -2.357,2.507 -2.341,2.511 -2.325,2.516 -2.309,2.522 -2.293,2.528 -2.277,2.535 -2.262,2.544 -2.248,2.552 -2.234,2.562 -2.22,2.572 -2.208,2.583 -2.195,2.595 -2.183,2.608 -2.172,2.62 -2.162,2.634 -2.152,2.648 -2.144,2.662 -2.135,2.677 -2.128,2.693 -2.122,2.709 -2.116,2.725 -2.111,2.741 -2.107,2.757 -2.104,2.774 -2.102,2.791 -2.1,2.808 -2.1,2.825 -2.1,3.025 -2.1,3.042 -2.102,3.059 -2.104,3.076 -2.107,3.093 -2.111,3.109 -2.116,3.125 -2.122,3.141 -2.128,3.157 -2.135,3.173 -2.144,3.187 -2.152,3.202 -2.162,3.216 -2.172,3.23 -2.183,3.242 -2.195,3.255 -2.208,3.267 -2.22,3.278 -2.234,3.288 -2.248,3.298 -2.262,3.306 -2.277,3.315 -2.293,3.322 -2.309,3.328 -2.325,3.334 -2.341,3.339 -2.357,3.343 -2.374,3.346 -2.391,3.348 -2.408,3.35 -2.425,3.35 -2.425,3.55
  Keep-Out Layer region: 2.6,-1.025 2.05,-1.025 2.05,0.875 2.6,0.875
  Keep-Out Layer region: 0.25,-1.025 -0.25,-1.025 -0.25,0.875 0.25,0.875
  Keep-Out Layer region: -2.05,-1.025 -2.6,-1.025 -2.6,0.875 -2.05,0.875
  Keep-Out Layer region: 3.75,-1.525 -3.75,-1.525 -3.75,-1.025 3.75,-1.025
  Keep-Out Layer region: 3.75,0.875 -3.75,0.875 -3.75,1.925 3.75,1.925
  Keep-Out Layer region: 2.6,-1.025 2.05,-1.025 2.05,0.875 2.6,0.875
  Keep-Out Layer region: 0.25,-1.025 -0.25,-1.025 -0.25,0.875 0.25,0.875
  Keep-Out Layer region: -2.05,-1.025 -2.6,-1.025 -2.6,0.875 -2.05,0.875
  Keep-Out Layer region: 3.75,-1.525 -3.75,-1.525 -3.75,-1.025 3.75,-1.025
  Keep-Out Layer region: 3.75,0.875 -3.75,0.875 -3.75,1.925 3.75,1.925
  silkscreen extent -3.75,-1.53 3.75,4.24, body extent -4.03,-2.63 4.06,3.18, height 2.71
"LS R976-NR-1" [mm]
  rect 1.2x1.2 smd paste+0 mask+0: 1(-1.05,0) 2(1.05,0)
  silkscreen extent -2.37,-0.97 1,0.97, body extent -1,-0.68 0.9,0.68, height 0.9
OSC_CSTCE8M00G52-R0 [mm]
  rect 0.4x1.9 smd: 1(-1.2,0) 2(0,0) 3(1.2,0)
  silkscreen extent -2.2,-0.65 1.72,0.65, body extent -1.6,-0.65 1.6,0.65, height 0.8
QFN-24-EP [mil]
  oval 40x10 smd: 1(-81.35,49.48) 2(-81.35,29.51) 3(-81.35,9.74) 4(-81.35,-11.32) 5(-81.35,-31.18) 6(-81.35,-51.05) 13(82.13,-51.05) 14(82.13,-31.18) 15(82.13,-11.32) 16(82.13,9.74) 17(82.13,29.51) 18(82.13,49.48)
  oval 10x40 smd: 7(-49.87,-83.53) 8(-30,-83.53) 9(-10.14,-83.53) 10(10.93,-83.53) 11(30.69,-83.53) 12(50.66,-83.53) 19(50.66,81.95) 20(30.69,81.95) 21(10.93,81.95) 22(-10.14,81.95) 23(-30,81.95) 24(-49.87,81.95)
  rect 103x103 smd paste-78.74: P$1(0.79,-0.39)
  silkscreen extent -98,-83 83,98, body extent -79,-79 79,79, height 36
RES-0603 [mm]
  rect 0.85x0.95 smd: 1(-0.65,0) 2(0.65,0)
  silkscreen extent -1.27,-0.7 1.27,0.7, body extent -0.8,-0.4 0.8,0.4, height 0.45
S1A-13-F [mm]
  rect 2.5x1.7 smd paste+0 mask+0: 1(-2,0) 2(2,0)
  silkscreen extent -4.03,-1.2 2.15,1.2, body extent -2.6,-1.3 2.6,1.3, height 2.4
SOT23-3 [mm]
  rect 0.6x0.8 smd: 1(-0.95,-1.01) 2(0.95,-1.01) 3(0,1.01)
  silkscreen extent -1.57,-0.66 1.57,0.65, body extent -1.45,-1.33 1.45,1.07, height 1.02
SOT-223-4 [mm]
  rect 2.15x1 smd: 1(-2.9,2.3) 2(-2.9,0) 3(-2.9,-2.3)
  rect 2.15x3.25 smd: 4(2.9,0)
  silkscreen extent -3.3,-3.25 1.5,3.81, body extent -3.5,-3.25 3.5,3.25, height 1.7
STMicroelectronics_LQFP64-5W_MFG [mm]
  rect 1.2x0.3 smd paste+0 mask+0: 1(-5.75,3.75) 2(-5.75,3.25) 3(-5.75,2.75) 4(-5.75,2.25) 5(-5.75,1.75) 6(-5.75,1.25) 7(-5.75,0.75) 8(-5.75,0.25) 9(-5.75,-0.25) 10(-5.75,-0.75) 11(-5.75,-1.25) 12(-5.75,-1.75) 13(-5.75,-2.25) 14(-5.75,-2.75) 15(-5.75,-3.25) 16(-5.75,-3.75) 33(5.75,-3.75) 34(5.75,-3.25) 35(5.75,-2.75) 36(5.75,-2.25) 37(5.75,-1.75) 38(5.75,-1.25) 39(5.75,-0.75) 40(5.75,-0.25) 41(5.75,0.25) 42(5.75,0.75) 43(5.75,1.25) 44(5.75,1.75) 45(5.75,2.25) 46(5.75,2.75) 47(5.75,3.25) 48(5.75,3.75)
  rect 0.3x1.2 smd paste+0 mask+0: 17(-3.75,-5.75) 18(-3.25,-5.75) 19(-2.75,-5.75) 20(-2.25,-5.75) 21(-1.75,-5.75) 22(-1.25,-5.75) 23(-0.75,-5.75) 24(-0.25,-5.75) 25(0.25,-5.75) 26(0.75,-5.75) 27(1.25,-5.75) 28(1.75,-5.75) 29(2.25,-5.75) 30(2.75,-5.75) 31(3.25,-5.75) 32(3.75,-5.75) 49(3.75,5.75) 50(3.25,5.75) 51(2.75,5.75) 52(2.25,5.75) 53(1.75,5.75) 54(1.25,5.75) 55(0.75,5.75) 56(0.25,5.75) 57(-0.25,5.75) 58(-0.75,5.75) 59(-1.25,5.75) 60(-1.75,5.75) 61(-2.25,5.75) 62(-2.75,5.75) 63(-3.25,5.75) 64(-3.75,5.75)
  silkscreen extent -6.97,-5 5,5, body extent -6,-6 6,6, height 1.6
TL3305BF260QG [mm]
  rect 1.6x1.4 smd: 1(-3.6,-1.5) 2(3.6,-1.5) 3(-3.6,1.5) 4(3.6,1.5)
  silkscreen extent -2.25,-2.25 2.25,2.25, body extent -3.75,-2.25 3.75,2.25, height 4.9
TVS-1610 [mm]
  rect 0.55x0.8 smd paste-1000 mask+0: 1(-0.625,0) 2(0.625,0)
  silkscreen extent -1.72,-0.82 0.85,0.82, body extent -0.8,-0.5 0.8,0.5, height 0.65